# Altium PCB Copy of DAP-PCB.PcbDoc (part 5 of 5)
Units mm, origin at the board's own origin, x right, y up, seen from the top; angles counter-clockwise.
Board outline 63 x 53 mm, 6 copper layers (Top Layer (Sig), L2 (GND), L3 (Sig), L4 (Sig), L5 (GND), Bottom Layer (Sig)), stack 0.87 mm thick; 262 components, 167 nets, 874 pads, 298 vias.
Unrouted connection lines stored in the file: 134.
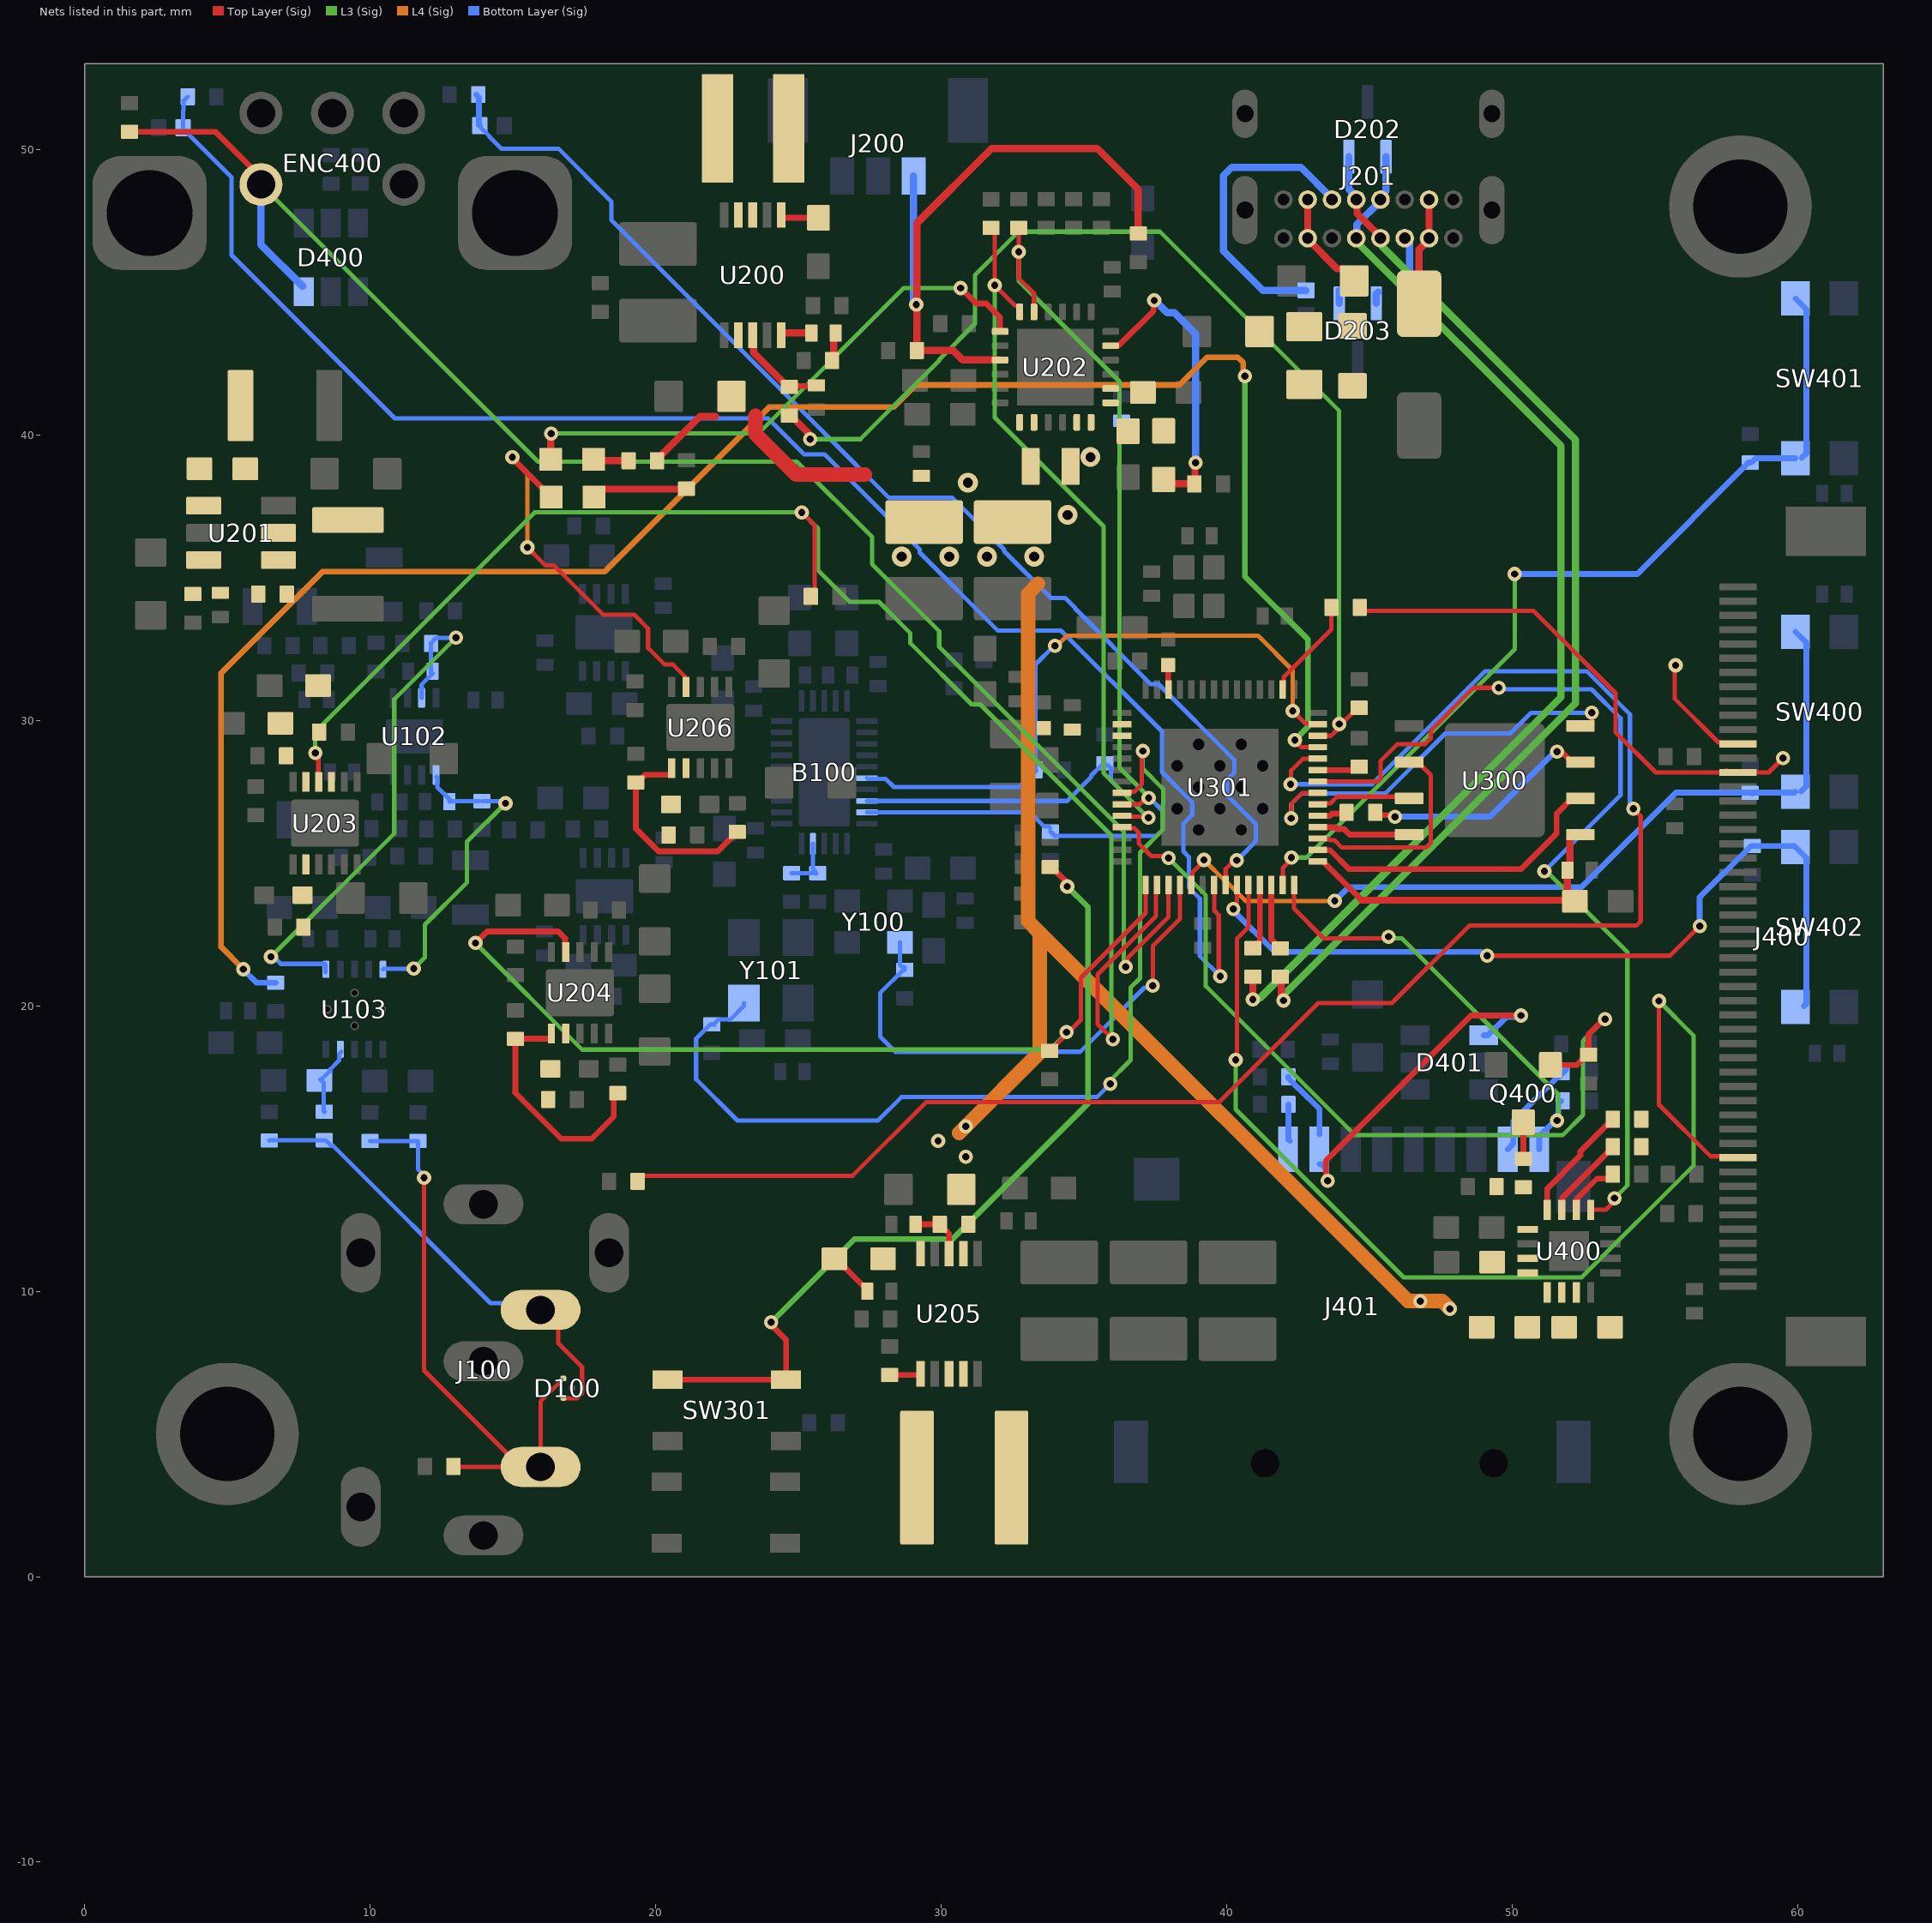
[diagram p7: the nets of this part, all layers, seen from the top]

## Via types
v1: diameter 0.5, hole 0.25, Top Layer (Sig) to Bottom Layer (Sig), tented both sides, 270 vias
v2: diameter 0.7, hole 0.35, Top Layer (Sig) to Bottom Layer (Sig), tented both sides, 17 vias
v3: diameter 1.25, hole 0.75, Top Layer (Sig) to Bottom Layer (Sig), 6 vias
v4: diameter 0.4/0.4/0.4/0.4/0.4/0.4 (per signal layer), hole 0.2, Top Layer (Sig) to Bottom Layer (Sig), tented both sides, 5 vias

## Nets (pads, with @x,y where several pads share a name; then routed paths per layer and width w, separated by ;. In a path a pad name is that pad's centre, name@x,y a point inside that pad or via, vN(x,y) a via of type N, cw(c..) or ccw(c..) an arc to the next point about the centre after c; other vN are vias at no path point) (continued)
NetC201_1: C201.1 L202.1 U201.5 | length 0.2
  Top Layer (Sig) w0.254: U201.5@6.403,36.751 U201.5@6.553,36.601
NetC201_2: C201.2 L201.2 U201.1
NetC205_1: C205.1 R201.1 R204.2 U201.3 | length 0.5
  Top Layer (Sig) w0.254: U201.3@3.789,35.435 3.972,35.618 U201.3@4.17,35.618 ; C205.1@4.724,34.425 C205.1@4.724,34.468 ; C205.1@4.801,34.425 C205.1@4.801,34.442
NetC212_1: C212.1 R213.1 | length 0.9
  Top Layer (Sig) w0.203: R213.1@26.213,42.697 R213.1@26.245,42.73 ; C212.1@26.245,43.506 C212.1@26.308,43.569
  Top Layer (Sig) w0.254: R213.1@26.245,42.73 C212.1@26.245,43.506
NetC219_2: C219.2 D201.A FB200.1 J201.A4 J201.A9 J201.B4 J201.B9 | length 7.4
  Top Layer (Sig) w0.254: J201.B4@42.842,48.242 42.842,46.852 43.872,45.821 44.098,45.821 44.471,45.448 C219.2@44.471,45.398 ; D201.A@46.745,44.597 46.745,46.505 47.092,46.852 J201.A4@47.092,46.892 J201.B9@47.092,48.242
NetC221_2: C221.2 R227.1
NetC223_1: C223.1 R233.2 U204.7
NetC226_2: C226.2 R238.1 | length 1.7
  Top Layer (Sig) w0.203: R238.1@26.265,11.14 26.315,11.14 27.26,10.196 27.302,10.196 27.432,10.066 C226.2@27.432,9.957
NetC233_1: C233.1 R248.2 U206.7
NetC302_2: C302.2 L300.1 U301.2 U301.3
NetC404_2: C404.2 R400.2 U301.22 | length 42.5
  Top Layer (Sig) w0.152: U301.22@39.964,24.234 39.964,24.788 40.272,25.095 v1(40.361,25.095)
  Bottom Layer (Sig) w0.152: C404.2@13.843,50.833 13.843,50.803 14.179,50.467 14.179,50.447 14.595,50.031 16.596,50.031 18.453,48.174 18.453,47.525 25.917,40.06 25.917,40.053 28.174,37.797 30.397,37.797 32.211,35.983 32.211,35.926 33.845,34.291 34.341,34.291 34.684,33.948 34.684,33.925 37.337,31.271 37.615,31.271 40.268,28.618 40.268,28.163 40.01,27.905 40.01,27.38 40.919,26.471 40.919,26.467 41.018,26.368 41.018,25.753 v1@40.437,25.171
  Bottom Layer (Sig) w0.203: R400.2@13.716,51.918 13.814,51.82 13.814,50.862 C404.2@13.843,50.833
NetC405_2: C405.2 R408.1 U301.21 | length 58.8
  Top Layer (Sig) w0.152: U301.21@39.564,24.234 39.564,23.338 39.726,23.177 39.726,21.082 v1(39.776,21.031)
  Bottom Layer (Sig) w0.152: C405.2@3.451,50.757 3.451,50.727 5.147,49.03 5.147,46.3 10.869,40.579 23.937,40.579 25.194,39.322 25.919,39.322 29.247,35.994 29.247,35.882 31.987,33.142 34.029,33.142 34.03,33.14 34.209,33.14 37.735,29.614 37.735,28.19 38.794,27.131 38.794,26.687 38.485,26.378 38.485,25.409 38.675,25.218 38.675,24.143 39.065,23.753 39.065,21.742 v1(39.776,21.031) ; C405.2@3.454,50.775 3.454,51.361 3.466,51.373 3.466,51.701 R408.1@3.615,51.849
NetC410_1: C410.1 U400.8
NetC410_2: C410.2 U400.9
NetC411_1: C411.1 U400.11
NetC411_2: C411.2 U400.10
NetD200_A: D200.A R206.1 | length 1.1
  Top Layer (Sig) w0.254: D200.A@17.983,39.141 18.026,39.098 R206.1@19.055,39.098
NetD203_1: D203.1 J201.B5 R234.2 | length 11
  Bottom Layer (Sig) w0.254: R234.2@42.778,45.067 41.267,45.067 39.887,46.448 39.887,49.079 40.184,49.377 40.954,49.377 42.597,49.377 43.692,48.283 J201.B5@43.692,48.242 ; D203.1@43.942,44.61 D203.1@43.942,45.067
NetD203_2: D203.2 J201.A5 R235.2 | length 2.4
  Bottom Layer (Sig) w0.254: D203.2@45.242,44.61 45.242,44.935 D203.2@45.315,45.008 ; J201.A5@46.242,46.892 46.41,46.892 R235.2@46.41,45.048
NetD204_A: D204.A R242.1 | length 3.2
  Top Layer (Sig) w0.254: D204.A@17.983,37.922 17.983,37.971 18.114,38.101 21.068,38.101 R242.1@21.082,38.116
NetD204_C: D204.C U206.4 | length 13.6
  Top Layer (Sig) w0.152: v1@15.405,36.163 16.135,35.433 16.434,35.433 18.161,33.706 19.246,33.706 19.736,33.215 19.736,32.537 20.32,31.953 20.609,31.953 21.016,31.546 21.016,31.221 U206.4@21.065,31.172
  Top Layer (Sig) w0.203: v1(14.981,39.218) 14.981,39.188 16.205,37.964 D204.C@16.205,37.846
  L4 (Sig) w0.152: v1(14.981,39.218) 15.507,38.692 v1(15.507,36.061)
NetD401_1: D401.1 J401.2 R416.1 | length 14.5
  Top Layer (Sig) w0.203: v1(43.535,13.868) 43.478,13.925 43.478,14.573 48.565,19.66 v1@50.368,19.66
  Bottom Layer (Sig) w0.203: R416.1@42.164,17.508 42.164,17.458 42.5,17.122 42.512,17.122 43.256,16.378 J401.2@43.256,15.494 ; J401.2@43.256,14.453 43.318,14.453 43.498,14.273 43.498,13.905 v1(43.535,13.868) ; D401.1@49.003,18.966 49.153,18.966 49.789,19.603 50.261,19.603 v1(50.317,19.66)
NetJ401_1: J401.1 R417.1 | length 1.3
  Bottom Layer (Sig) w0.203: R417.1@42.164,16.543 42.164,15.316 J401.1@42.215,15.265
NetJ401_8: J401.8 R418.1 | length 3.7
  Bottom Layer (Sig) w0.203: J401.8@49.849,14.971 50.041,15.163 50.041,15.954 51.574,17.488 51.617,17.488 51.881,17.752 R418.1@51.881,17.794
NetJ401_CD: J401.CD R419.2 U301.28 | length 15.8
  Top Layer (Sig) w0.152: U301.28@42.364,24.234 42.364,23.396 43.396,22.365 45.614,22.365 v1(45.669,22.42)
  L3 (Sig) w0.152: v1(45.669,22.42) 45.733,22.356 46.148,22.356 51.625,16.879 51.625,16.03 v1(51.574,15.979)
  Bottom Layer (Sig) w0.203: J401.CD@50.949,14.971 50.949,15.421 51.507,15.979 v1(51.574,15.979) ; v1@51.54,16.012 51.617,16.089 51.617,16.565 R419.2@51.714,16.662
NetQ400_1: Q400.1 R425.2 U301.11 | length 29.7
  Top Layer (Sig) w0.152: U301.11@36.339,26.259 36.373,26.225 36.767,26.225 36.918,26.074 36.918,25.693 37.363,25.248 37.897,25.248 v1(37.964,25.181)
  Top Layer (Sig) w0.203: Q400.1@51.344,17.926 52.275,17.926 R425.2@52.638,18.288 ; R425.2@52.68,18.28 52.68,18.999 v1@53.238,19.558
  L3 (Sig) w0.152: v1(37.964,25.181) 39.272,23.873 39.272,20.686 44.483,15.475 51.783,15.475 52.486,16.178 52.486,18.763 v1@53.315,19.592
  other v1: 53.256,19.533
NetQ400_3: Q400.3 R423.1 | length 1.3
  Top Layer (Sig) w0.203: R423.1@50.394,14.64 50.394,15.875 Q400.3@50.419,15.9
NetR119_1: R119.1 U301.38 | length 62.1
  Top Layer (Sig) w0.152: R119.1@19.37,13.854 19.37,13.874 19.544,14.048 26.902,14.048 29.482,16.627 39.741,16.627 43.208,20.094 45.788,20.094 48.504,22.809 54.356,22.809 54.503,22.956 54.503,26.64 54.249,26.894 v1(54.249,26.903) ; v1(42.242,27.762) 42.262,27.782 42.262,28.241 42.68,28.659 U301.38@43.189,28.659
  Bottom Layer (Sig) w0.152: v1(42.242,27.762) 45.095,27.762 49.057,31.725 52.613,31.725 54.127,30.21 54.127,27 v1@54.282,26.846
NetR128_1: R128.1 U301.39 | length 67.5
  Top Layer (Sig) w0.152: 42.57,29.108 42.62,29.059 U301.39@43.189,29.059
  L3 (Sig) w0.203: v1(40.64,42.062) 40.64,35.045 42.846,32.84 42.846,29.765 42.469,29.388 v1@42.469,29.337
  L4 (Sig) w0.203: v1(5.559,21.281) 4.779,22.061 4.779,31.664 8.323,35.208 18.216,35.208 23.981,40.974 28.331,40.974 29.112,41.754 38.35,41.754 39.319,42.723 40.386,42.723 40.583,42.526 40.583,42.119 v1(40.64,42.062) ; v1@42.418,29.362 v1@42.443,29.362
  Bottom Layer (Sig) w0.203: v1(5.559,21.281) 5.559,21.266 6.015,20.809 R128.1@6.695,20.809
  other v1: 42.393,29.312
NetR203_1: R203.1 R308.2 U301.40 | length 39.2
  Top Layer (Sig) w0.152: U301.40@43.189,29.459 43.658,29.459 43.876,29.677 43.876,29.804 v1(43.942,29.87) ; v1@43.891,29.921 44.073,29.921 44.53,30.378 R308.2@44.577,30.378
  Top Layer (Sig) w0.254: R203.1@24.684,40.681 24.734,40.681 25.425,39.99 v1@25.425,39.853
  L3 (Sig) w0.152: v1(25.413,39.851) 27.173,39.851 29.945,42.624 29.945,42.654 31.187,43.896 31.187,45.599 32.709,47.121 37.666,47.121 43.942,40.845 v1(43.942,29.87)
NetR204_1: R204.1 U201.4 | length 0.3
  Top Layer (Sig) w0.254: U201.4@6.79,35.618 U201.4@7.061,35.618
NetR207_2: R207.2 U200.1 | length 1.4
  Top Layer (Sig) w0.203: U200.1@24.398,47.706 24.398,47.658 24.449,47.607 25.611,47.607 R207.2@25.705,47.701
NetR219_1: R219.1 R226.2 U203.3
NetR220_1: R220.1 R224.2 U203.5
NetR222_1: R222.1 R228.2 U204.6 | length 8.6
  Top Layer (Sig) w0.203: R228.2@15.088,18.821 15.088,16.948 16.694,15.342 17.755,15.342 18.534,16.121 18.534,16.803 R222.1@18.671,16.941 ; R228.2@15.088,18.847 16.351,18.847 U204.6@16.351,19.03
NetR223_1: R223.1 U204.4 U301.15 | length 34
  Top Layer (Sig) w0.152: R223.1@33.788,18.396 33.829,18.396 34.031,18.598 34.031,18.639 34.43,19.037 34.9,19.507 34.9,20.98 37.164,23.245 37.164,24.019 U301.15@37.164,24.234
  Top Layer (Sig) w0.203: v1(13.691,22.2) 14.093,22.602 16.59,22.602 16.827,22.365 16.827,21.904 U204.4@16.851,21.88 ; U301.15@37.164,24.019 U301.15@37.164,24.234
  L3 (Sig) w0.152: v1(13.691,22.2) 17.424,18.466 33.807,18.466 v1@34.467,19.126
  other v1: 34.392,19.075
NetR238_2: R238.2 U205.10
NetR239_2: R239.2 U205.1 | length 1.1
  Top Layer (Sig) w0.203: R239.2@28.194,7.067 29.241,7.067 U205.1@29.277,7.103
NetR243_1: R243.1 R245.2 U206.6 | length 7.3
  Top Layer (Sig) w0.203: R245.2@19.355,27.864 19.304,27.813 19.304,26.211 20.107,25.408 22.174,25.408 22.662,25.895 22.662,25.945 22.81,26.094 R243.1@22.86,26.094 ; R245.2@19.456,27.889 19.456,27.927 19.618,28.088 20.541,28.088 20.565,28.112 U206.6@20.565,28.322
NetR302_2: R302.2 SW301.1 SW301.2 | length 29.5
  Top Layer (Sig) w0.203: SW301.1@20.419,6.904 SW301.2@24.569,6.904 24.569,8.299 v1@24.003,8.865 ; R302.2@33.822,24.861 33.872,24.861 34.36,24.373 34.36,24.238 v1(34.417,24.181)
  L3 (Sig) w0.203: v1(24.046,8.911) 26.959,11.824 30.389,11.824 35.147,16.583 35.147,23.451 v1(34.417,24.181)
NetR303_2: R303.2 U301.44 | length 3.6
  Top Layer (Sig) w0.152: U301.44@41.964,31.084 41.998,31.118 41.998,31.42 42,31.422 42,31.514 43.671,33.185 R303.2@43.671,33.96
NetR304_1: R304.1 U301.25 | length 2.3
  Top Layer (Sig) w0.203: R304.1@40.919,22.015 41.165,22.261 U301.25@41.165,24.233
NetR305_2: R305.2 U301.37 | length 1.5
  Top Layer (Sig) w0.203: U301.37@43.189,28.259 44.444,28.259 44.602,28.417 R305.2@44.602,28.448
NetR306_1: R306.1 U301.26 | length 2.4
  Top Layer (Sig) w0.203: U301.26@41.564,24.234 41.564,22.335 41.686,22.213 41.686,22.162 41.835,22.014 R306.1@41.885,22.014
NetR420_2: R420.2 U400.3 | length 2.9
  Top Layer (Sig) w0.203: U400.3@51.74,12.852 51.763,12.876 51.763,13.274 53.353,14.864 53.377,14.864 53.492,14.979 R420.2@53.492,15.037
NetR421_2: R421.2 U400.4 | length 4.2
  Top Layer (Sig) w0.203: U400.4@51.232,12.852 51.232,13.594 52.396,14.759 52.396,14.898 53.327,15.829 53.377,15.829 53.526,15.977 R421.2@53.526,16.027
NetR422_2: R422.2 U400.2 | length 2.1
  Top Layer (Sig) w0.203: U400.2@52.248,12.852 52.271,12.876 52.271,13.243 52.971,13.943 53.44,13.943 R422.2@53.594,14.097
NetR423_2: R423.2 R424.2 U400.5
NetU301_36: U301.36 U400.1 | length 33.5
  Top Layer (Sig) w0.152: U301.36@43.189,27.859 45.301,27.859 45.39,27.948 45.39,28.576 45.985,29.171 46.951,29.171 47.149,29.369 47.149,29.641 48.648,31.14 v1(49.53,31.14) ; U400.1@52.756,12.852 53.289,12.852 v1@53.746,13.31
  L3 (Sig) w0.152: v1(51.13,24.714) 51.206,24.714 54.038,21.883 54.038,13.708 v1(53.588,13.259)
  Bottom Layer (Sig) w0.152: v1(49.53,31.14) 49.581,31.09 52.781,31.09 53.797,30.074 53.797,27.381 v1(51.13,24.714)
PG_LDO-: R241.1 U203.4 U301.16 | length 55.4
  Top Layer (Sig) w0.152: v1(8.077,28.854) 8.077,28.76 8.188,28.65 8.188,27.851 U203.4@8.197,27.841 ; v1@25.171,37.262 25.171,37.236 25.572,36.836 25.572,34.48 R241.1@25.433,34.341 ; v1(36.017,18.821) 35.484,19.355 35.484,21.098 37.531,23.144 37.531,24.2 U301.16@37.564,24.234
  L3 (Sig) w0.152: v1(8.077,28.854) 8.077,29.593 15.772,37.287 25.044,37.287 v1@25.095,37.236 ; v1@25.171,37.287 25.171,37.236 25.689,36.718 25.689,35.252 26.792,34.149 27.823,34.149 28.925,33.047 28.925,32.701 31.064,30.562 31.369,30.562 35.961,25.97 35.961,18.878 v1(36.017,18.821)
  other v1: 25.121,37.287
PMID_BQ: C200.2 U202.20
POWER: R401.2 SW401.1 SW401.3 U301.27 | length 31.8
  Top Layer (Sig) w0.152: U301.27@41.964,24.234 41.964,24.824 42.272,25.132 v1(42.272,25.193)
  L3 (Sig) w0.152: v1(42.272,25.193) 42.795,25.193 50.089,32.487 v1(50.089,35.128)
  Bottom Layer (Sig) w0.203: v1(50.089,35.128) 54.384,35.128 58.286,39.03 R401.2@58.336,39.03 ; R401.2@58.395,39.039 58.536,39.18 SW401.1@59.925,39.18 ; SW401.3@59.925,44.78 60.304,44.401 60.304,39.349 SW401.1@60.147,39.192
RESET: J400.10 U301.24 | length 41.4
  Top Layer (Sig) w0.152: v1@40.335,18.136 40.365,18.166 40.365,22.352 40.764,22.751 U301.24@40.764,24.234 ; v1(55.143,20.168) 55.143,16.537 56.955,14.725 57.741,14.725 J400.10@57.76,14.707
  L3 (Sig) w0.152: v1(40.318,18.103) 40.318,16.372 46.207,10.483 52.434,10.483 56.363,14.412 56.363,18.948 v1(55.143,20.168)
RESETB_DAC: B100.21 R111.2 U301.41 | length 22.4
  Top Layer (Sig) w0.152: v1(42.316,30.328) 42.751,29.893 43.156,29.893 U301.41@43.189,29.859
  L4 (Sig) w0.152: v1(33.988,32.612) 34.058,32.612 34.415,32.969 41.097,32.969 42.316,31.75 v1(42.316,30.328)
  Bottom Layer (Sig) w0.152: B100.21@27.408,27.976 27.432,27.952 28.055,27.952 28.346,27.661 32.748,27.661 R111.2@33.332,28.245 ; R111.2@33.307,28.27 33.307,31.961 33.958,32.612 v1(33.988,32.612)
RIGHT_EAR: C124.1 R125.1 U103.9 | length 2.5
  Bottom Layer (Sig) w0.152: C124.1@8.255,17.424 8.373,17.306 8.373,16.311 R125.1@8.396,16.288 ; C124.1@8.28,17.4 8.592,17.712 8.592,17.762 8.91,18.08 8.91,18.308 U103.9@8.992,18.39
RING: D100.3 J100.3 R117.2 R125.2 | length 16.2
  Top Layer (Sig) w0.152: J100.3@15.97,9.344 16.017,9.344 16.594,8.767 16.594,8.17 17.423,7.341 17.423,6.428 17.245,6.25 16.793,6.25 16.789,6.253 D100.3@16.789,6.274
  Bottom Layer (Sig) w0.152: R117.2@6.466,15.28 6.47,15.284 8.439,15.284 R125.2@8.484,15.24 ; R125.2@8.499,15.235 8.62,15.114 8.686,15.114 14.217,9.583 15.97,9.583 J100.3@16.053,9.5
SCL_BQ: B100.23 R110.1 R208.1 U202.6 U301.10 | length 36.8
  Top Layer (Sig) w0.152: R208.1@31.775,47.226 31.877,47.125 v1(31.877,45.245) 32.598,44.524 32.709,44.524 32.753,44.48 U202.6@32.753,44.31 ; U301.10@36.339,26.659 36.372,26.626 37.233,26.626 v1(37.266,26.593)
  L3 (Sig) w0.152: v1(31.877,45.245) 31.877,40.607 35.692,36.792 35.692,28.151 37.25,26.593 v1(37.266,26.593)
  Bottom Layer (Sig) w0.152: B100.23@27.408,27.176 34.415,27.176 35.257,28.018 35.257,28.068 35.598,28.409 R110.1@35.648,28.409 ; R110.1@35.738,28.499 R110.1@35.648,28.409 ; v1(37.266,26.593) 37.25,26.593 35.952,27.891 35.952,28.325 35.868,28.409 R110.1@35.648,28.409
SCL_LCD: J400.37 R303.1 | length 17.7
  Top Layer (Sig) w0.152: R303.1@44.671,33.833 50.749,33.833 53.627,30.955 53.627,29.581 55.034,28.173 55.449,28.173 57.434,28.173 J400.37@57.506,28.245 ; J400.37@57.912,28.177 58.985,28.177 v1@59.436,28.627
  Top Layer (Sig) w0.254: v1@59.436,28.627 v1@59.436,28.651
  other v1: 59.485,28.676
SDA_BQ: B100.24 R109.1 R211.1 U202.5 U301.9 | length 37.3
  Top Layer (Sig) w0.152: R211.1@32.741,47.252 32.715,47.226 32.715,45.499 33.253,44.961 U202.5@33.253,44.31 ; U301.9@36.339,27.059 36.952,27.059 37.177,27.284 v1(37.272,27.284)
  L3 (Sig) w0.152: v1@32.715,46.406 32.717,46.404 32.717,45.402 36.246,41.874 36.246,28.341 37.272,27.315 v1(37.272,27.284)
  Bottom Layer (Sig) w0.152: B100.24@27.408,26.776 33.11,26.776 33.609,26.277 33.768,26.277 R109.1@33.807,26.238 ; R109.1@33.833,26.103 33.981,25.955 37.537,25.955 37.77,26.188 37.77,26.802 37.767,26.805 37.767,26.824 37.307,27.284 v1(37.272,27.284)
  other v1: 32.717,46.417
SELECT: D400.3 ENC400.5 R412.2 U301.17 | length 58.4
  Top Layer (Sig) w0.152: v1(36.465,21.366) 36.528,21.429 36.528,21.675 37.964,23.111 U301.17@37.964,24.234
  Top Layer (Sig) w0.203: R412.2@1.575,50.622 4.572,50.622 6.176,49.018 ENC400.5@6.176,48.776
  L3 (Sig) w0.152: ENC400.5@6.172,48.768 6.184,48.768 15.886,39.065 24.943,39.065 27.584,36.424 27.584,35.467 29.933,33.119 29.933,32.577 36.398,26.111 36.398,21.432 v1(36.465,21.366)
  Bottom Layer (Sig) w0.254: ENC400.5@6.176,48.776 6.176,46.666 7.63,45.212 D400.3@7.645,45.212
SET_LDO-: C222.2 R232.2 U203.8
SHDN_BB_3.3: C230.2 R237.2 U205.8 | length 2
  Top Layer (Sig) w0.203: C230.2@29.108,12.344 R237.2@29.955,12.344 ; R237.2@29.955,12.294 30.103,12.146 30.153,12.146 30.277,12.022 U205.8@30.277,11.317
SHDN_BB_3.9: C213.2 R203.2 U200.8 | length 3.3
  Top Layer (Sig) w0.203: R203.2@24.714,41.656 24.768,41.71 25.605,41.71 C213.2@25.633,41.739
  Top Layer (Sig) w0.254: U200.8@23.398,43.492 23.424,43.467 23.424,42.891 24.583,41.732 R203.2@24.638,41.732
SPI_CS0: U300.1 U301.32 | length 3
  Top Layer (Sig) w0.203: U301.32@43.485,26.249 43.8,26.249 43.856,26.192 44.115,26.192 44.311,25.996 U300.1@46.395,25.996
SPI_D: U300.5 U301.35 | length 14.7
  Top Layer (Sig) w0.152: v1(42.266,26.568) 42.266,27.073 42.652,27.459 U301.35@43.189,27.459 ; U300.5@52.395,29.806 52.669,29.806 52.793,29.93 v1(52.793,30.265)
  Bottom Layer (Sig) w0.152: v1(42.266,26.568) 42.266,27.073 42.625,27.432 45.552,27.432 47.66,29.54 49.939,29.54 50.664,30.265 v1(52.793,30.265)
SPI_HD: U300.7 U301.30 | length 10.7
  Top Layer (Sig) w0.203: U301.30@43.189,25.459 43.198,25.451 43.489,25.451 43.492,25.449 43.63,25.449 44.292,24.786 50.302,24.786 51.562,26.046 51.562,26.733 52.109,27.28 U300.7@52.222,27.28
SPI_Q: U300.2 U301.34 | length 3.3
  Top Layer (Sig) w0.152: U301.34@43.189,27.059 43.223,27.093 43.634,27.093 43.866,27.326 46.334,27.326 U300.2@46.355,27.305
SPI_WP: U300.3 U301.31 | length 7.5
  Top Layer (Sig) w0.152: U301.31@43.189,25.859 43.219,25.83 43.613,25.83 43.639,25.804 43.777,25.804 44.039,25.542 46.986,25.542 47.149,25.705 47.149,28.086 46.822,28.412 46.519,28.412 U300.3@46.395,28.536
SPICLK: R307.2 U301.33 | length 0.7
  Top Layer (Sig) w0.203: 43.536,26.649 43.609,26.649 43.692,26.732 44.164,26.732 R307.2@44.204,26.772
SPICLK_FL: R307.1 U300.6 | length 8.3
  Top Layer (Sig) w0.203: R307.1@45.204,26.772 45.295,26.68 45.839,26.68 v1(45.896,26.623) ; v1(51.573,28.904) 51.63,28.847 51.784,28.847 52.095,28.536 U300.6@52.395,28.536
  Bottom Layer (Sig) w0.203: v1(45.896,26.623) 49.223,26.624 51.503,28.904 v1(51.573,28.904)
STAT_BQ: D200.C U202.7 | length 19.8
  Top Layer (Sig) w0.203: v1(30.683,45.143) 31.226,44.6 31.582,44.6 32.068,44.114 U202.7@32.068,43.625
  Top Layer (Sig) w0.254: D200.C@16.327,39.142 v1@16.327,40.035
  L3 (Sig) w0.152: v1(16.338,40.049) 23.592,40.049 28.686,45.143 30.767,45.143 v1@30.836,45.212
SUMM_L: C118.1 R114.2 U102.1 U103.5 | length 11.1
  L3 (Sig) w0.152: v1(11.527,21.302) 11.917,21.692 11.917,22.84 13.386,24.309 13.386,25.74 v1@14.757,27.111
  Bottom Layer (Sig) w0.152: U103.5@10.454,21.275 10.482,21.302 11.489,21.302 v1@11.506,21.285 ; U102.1@12.319,28.016 12.356,27.979 12.356,27.66 12.776,27.24 C118.1@12.776,27.152 12.794,27.17 R114.2@13.809,27.17 ; R114.2@13.919,27.17 14.613,27.17 v1@14.656,27.127
  other v1: 14.741,27.095
SUMM_R: C123.1 R115.2 U102.7 U103.1 | length 19.2
  L3 (Sig) w0.152: v1(6.528,21.717) 10.846,26.035 10.846,30.734 v1@12.979,32.868
  Bottom Layer (Sig) w0.152: v1(6.528,21.717) 6.622,21.717 6.87,21.469 8.41,21.469 8.433,21.446 U103.1@8.433,21.184 ; U102.7@11.807,30.786 11.807,31.259 12.167,31.618 C123.1@12.167,31.648 ; C123.1@12.192,31.648 12.133,31.648 12.133,32.714 12.307,32.888 13,32.888 v1(13.005,32.893)
SW1_BB_3.3: L204.1 U205.3
SW1_BB_3.9: L200.1 U200.3
SW2_BB_3.3: L204.2 U205.4
SW2_BB_3.9: L200.2 U200.4
SW_BQ: C207.1 L203.1 U202.17 U202.18
  other v2: 34.432,37.197 35.23,39.225
SYS: C203.2 C208.2 C209.2 C210.2 C224.2 C412.2 L203.2 R206.2 R237.1 R420.1 R421.1 U200.7 U202.13 U202.14 U205.7 U400.7 | length 48.3
  Top Layer (Sig) w0.254: R206.2@20.055,39.098 20.055,39.148 21.546,40.64 22.098,40.64
  Top Layer (Sig) w0.508: 23.495,40.677 23.495,40.03 24.917,38.608 27.323,38.608
  L4 (Sig) w0.508: 30.632,15.545 v1(30.861,15.773) 33.449,18.361 33.449,22.559 ; 33.397,34.789 33.049,34.441 33.049,22.959 33.449,22.559 ; v1(47.82,9.381) 47.549,9.652 46.356,9.652 33.449,22.559
  other v1: 46.787,9.652 30.861,14.707 29.896,15.265
  other v2: 28.618,35.733 30.286,35.733 31.607,35.733 33.258,35.733 30.937,38.325
TE: J400.39 | length 3.7
  Top Layer (Sig) w0.152: v1(55.728,31.928) 55.693,31.893 55.693,30.762 57.229,29.225 57.49,29.225 J400.39@57.539,29.177
TIP: D100.2 J100.2 R127.2 R129.2 R134.2 | length 21.2
  Top Layer (Sig) w0.152: v1(11.887,13.97) 11.887,7.227 15.075,4.039 J100.2@15.418,4.039 ; R129.2@12.852,3.912 12.92,3.844 J100.2@15.97,3.844 15.97,6.145 16.759,6.934 D100.2@16.764,6.934
  Bottom Layer (Sig) w0.152: R127.2@9.997,15.263 R134.2@11.661,15.263 ; R134.2@11.673,15.263 11.673,14.278 11.887,14.064 v1(11.887,13.97)
TRI_STATE_22: R106.2 U301.18 Y100.1 | length 18.4
  Top Layer (Sig) w0.152: v1(37.414,20.701) 37.414,22.094 38.364,23.044 U301.18@38.364,24.234
  Bottom Layer (Sig) w0.152: Y100.1@28.56,22.219 28.56,21.433 28.632,21.361 R106.2@28.727,21.361 ; R106.2@28.727,21.259 28.677,21.259 27.864,20.446 27.864,18.923 28.397,18.39 34.873,18.39 37.118,20.634 37.348,20.634 v1(37.414,20.701)
TRI_STATE_24: R107.2 U301.8 Y101.1 | length 34
  Top Layer (Sig) w0.152: U301.8@36.339,27.459 36.373,27.493 36.767,27.493 37.033,27.759 v1@37.033,28.854
  L3 (Sig) w0.152: v1@35.835,17.293 36.64,18.098 36.64,20.639 36.969,20.968 36.969,25.366 37.77,26.168 37.77,26.802 37.76,26.812 37.76,27.06 37.775,27.076 37.775,27.597 37.065,28.308 v1(37.065,28.923)
  Bottom Layer (Sig) w0.152: R107.2@21.971,19.354 21.921,19.354 21.417,18.85 21.417,17.427 22.868,15.977 27.788,15.977 28.612,16.801 35.461,16.801 35.88,17.221 v1@35.992,17.221 ; R107.2@22.047,19.329 22.047,19.371 22.195,19.519 22.62,19.519 23.094,19.993 Y101.1@23.094,20.093
  other v1: 35.926,17.267
TS: J200.3 R214.1 R215.2 U202.9 | length 23.1
  Top Layer (Sig) w0.254: U202.9@32.068,42.625 30.76,42.625 30.426,42.959 R215.2@29.151,42.959 29.151,44.566 29.151,47.421 31.768,50.038 35.466,50.038 36.906,48.598 R214.1@36.906,47.058
  Bottom Layer (Sig) w0.254: J200.3@29.038,49.071 29.038,44.725 29.185,44.577 v1@29.21,44.577
  other v1: 29.13,44.566
USB_D_N: D202.1 J201.A7 J201.B7 R304.2 | length 38.2
  Top Layer (Sig) w0.254: v1(40.919,20.218) R304.2@40.919,21.015
  L3 (Sig) w0.254: v1(40.919,20.218) 40.966,20.265 41.167,20.265 51.714,30.813 51.714,39.612 44.542,46.785 J201.A7@44.542,46.892
  Bottom Layer (Sig) w0.254: J201.A7@44.542,46.892 44.557,46.908 44.557,47.367 45.392,48.202 J201.B7@45.392,48.242 ; J201.B7@45.441,48.318 45.441,48.398 45.583,48.54 D202.1@45.583,49.746
USB_D_P: D202.2 J201.A6 J201.B6 R306.2 | length 37.9
  Top Layer (Sig) w0.254: R306.2@41.885,21.014 41.923,20.976 41.923,20.323 41.994,20.252 v1(41.994,20.185) ; J201.B6@44.542,48.242 44.568,48.216 44.568,47.757 45.392,46.933 J201.A6@45.392,46.892
  L3 (Sig) w0.254: v1(41.994,20.185) 42.041,20.232 42.041,20.421 52.222,30.603 52.222,39.823 45.467,46.578 45.467,46.816 J201.A6@45.392,46.892
  Bottom Layer (Sig) w0.254: D202.2@44.283,49.746 44.283,48.608 44.577,48.314 J201.B6@44.577,48.268
VC_BB_3.9: C212.2 U200.10 | length 1.2
  Top Layer (Sig) w0.203: U200.10@24.398,43.492 24.398,43.518 U200.10@24.449,43.569 ; C212.2@25.443,43.569 C212.2@25.502,43.51
  Top Layer (Sig) w0.254: U200.10@24.449,43.569 C212.2@25.443,43.569
VDD_SPI: C311.2 C312.2 U300.8 U301.29 | length 12.2
  Top Layer (Sig) w0.203: U301.29@43.409,25.044 43.409,25.021 44.731,23.698
  Top Layer (Sig) w0.254: 44.731,23.698 C312.2@52.172,23.698 ; C312.2@52.222,23.749 52.123,23.749 51.939,23.932 C311.2@51.939,24.745 52.022,24.828 52.022,25.923 52.134,26.035 U300.8@52.426,26.035
VDPM_BQ: R202.1 R205.2 U202.23 | length 10.8
  Top Layer (Sig) w0.203: U202.23@35.938,43.125 35.956,43.143 36.233,43.143 37.444,44.354 37.444,44.691 v1(37.465,44.712)
  Top Layer (Sig) w0.254: R202.1@37.795,38.44 37.949,38.285 R205.2@38.87,38.285 38.862,38.285 38.862,38.44 38.879,38.456 38.889,38.456 38.891,38.458 38.891,39.001 v1(38.913,39.022)
  Bottom Layer (Sig) w0.254: v1@37.44,44.737 37.46,44.737 37.922,44.276 38.177,44.276 38.913,43.54 v1(38.913,39.022)
VOLUME+: R404.2 SW400.1 SW400.3 U301.19 | length 29.7
  Top Layer (Sig) w0.152: U301.19@38.764,24.234 38.798,24.268 38.798,24.57 38.8,24.572 38.8,24.664 39.218,25.082 v1@39.218,25.115
  L4 (Sig) w0.152: v1(39.205,25.112) 39.981,24.336 40.004,24.336 40.667,23.673 43.713,23.673 v1@43.764,23.724
  Bottom Layer (Sig) w0.203: v1(43.79,23.673) 44.272,24.155 52.426,24.155 55.736,27.465 R404.2@58.336,27.465 ; R404.2@58.42,27.432 58.453,27.465 59.888,27.465 SW400.1@59.925,27.502 ; SW400.3@59.925,33.102 60.304,32.723 60.304,27.69 SW400.1@60.122,27.508
VOLUME-: R406.2 SW402.1 SW402.3 U301.23 | length 29.4
  Top Layer (Sig) w0.152: v1(40.234,23.393) 40.234,23.487 40.364,23.618 40.364,24.217 U301.23@40.356,24.226 ; v1(49.13,21.755) 55.531,21.755 56.611,22.835 v1@56.693,22.835
  Top Layer (Sig) w0.203: U301.23@40.356,24.226 U301.23@40.364,24.234
  Bottom Layer (Sig) w0.203: v1(40.234,23.393) 40.234,23.333 41.676,21.891 48.914,21.891 49.037,21.768 v1@49.149,21.768 ; v1@56.566,22.835 56.566,23.799 58.362,25.595 59.888,25.595 SW402.3@59.925,25.558 60.304,25.179 60.304,20.07 SW402.1@60.223,19.99
  other v1: 56.571,22.795
VUSB: C202.2 FB200.2 R202.2 R227.2 U202.19
XI: B100.29 R104.2 R105.1 | length 1.9
  Bottom Layer (Sig) w0.152: R105.1@24.765,24.646 25.621,24.646 R104.2@25.629,24.638 ; B100.29@25.508,25.676 25.508,24.784 R104.2@25.603,24.689
XTAL_P: L301.2 U301.54 | length 0.9
  Top Layer (Sig) w0.203: L301.2@37.948,31.935 37.954,31.929 37.954,31.386 37.956,31.384 37.956,31.093 U301.54@37.964,31.084
pads on no net: B100.4 B100.5 B100.6 B100.7 B100.26 B100.28 D400.6 ENC400.6 ENC400.7 J100.5 J201.A8 J201.B8 J400.44 J400.45 J400.46 J400.47 J400.S1 J400.S2 J401. U203.7 U301.1 U301.49 U301.50
copper on no net:
  other v3: 59.4,22.758 62.15,22.758 59.4,30.302 62.15,30.302 59.4,41.98 62.15,41.98

## Polygon pours and split planes (outlines as drawn)
EN_DAC_LDO+ on Top Layer (Sig) "EN_DAC_LDO+_L01_P043" (solid, pour order 43): 21.438,30.836 21.438,31.547 20.599,32.385 20.244,32.385 20.244,33.401 22.377,33.401 22.377,32.487 21.692,31.801 21.692,30.836
+3V3_DIG on Top Layer (Sig) "+3V3_DIG_L01_P032" (solid, pour order 32): 36.627,32.512 35.814,33.325 35.814,34.519 36.373,34.519 36.703,34.188 36.703,33.782 37.465,33.782 37.465,31.648 37.668,31.445 37.668,30.759 36.627,30.759
+3V3_DIG on Top Layer (Sig) "+3V3_DIG_L01_P099" (solid, pour order 99): 30.15,31.699 30.15,30.353 34.011,30.353 34.011,31.064 34.62,31.064 34.62,32.004 33.909,32.004 33.02,31.115 32.233,31.115 31.648,31.699
+3V3_DIG on Top Layer (Sig) "+3V3_DIG_L01_P097" (solid, pour order 97): 57.252,13.792 59.538,13.792 59.538,13.056 57.252,13.056
+3V3_DIG on Top Layer (Sig) "+3V3_DIG_L01_P096" (solid, pour order 96): 57.288,30.677 57.288,29.566 58.547,29.566 58.547,30.81 57.277,30.81
-3V3 on Top Layer (Sig) "-3V3_L01_P054" (solid, pour order 54): 8.509,25.298 8.509,24.587 8.814,24.282 8.814,22.123 8.077,22.123 8.077,18.898 10.744,18.898 10.744,25.298
+3V3_ANALOG on Top Layer (Sig) "+3V3_ANALOG_L01_P049" (solid, pour order 49): 19.406,17.501 19.406,16.408 21.463,16.408 21.463,19.38 17.729,19.38 17.729,18.618 18.263,18.618 18.263,17.501
+3V3_DAC on Top Layer (Sig) "+3V3_DAC_L01_P044" (solid, pour order 44): 24.943,28.677 23.673,28.677 21.946,28.677 21.946,27.965 22.454,27.457 22.454,26.594 23.571,26.594 23.571,25.324 24.943,25.324 24.943,26.924
+3V3_DIG on Top Layer (Sig) "+3V3_DIG_L01_P021" (solid, pour order 21): 31.166,11.75 32.385,11.75 32.817,12.182 32.817,12.715 33.655,13.553 33.655,14.732 40.056,14.732 43.307,11.481 43.307,9.769 32.385,9.769 31.166,10.988
NetC411_1 on Top Layer (Sig) "NETC411_1_L01_P065" (solid, pour order 65): 52.121,9.525 52.476,9.169 52.476,8.306 54.026,8.306 54.026,9.373 52.502,9.373 52.375,9.5 52.375,10.312 52.121,10.312
NetC411_2 on Top Layer (Sig) "NETC411_2_L01_P064" (solid, pour order 64): 51.613,9.169 51.46,9.169 51.181,8.89 51.181,8.28 52.299,8.28 52.299,9.068 51.867,9.5 51.867,10.312 51.613,10.312
NetR423_2 on Top Layer (Sig) "NETR423_2_L01_P063" (solid, pour order 63): 50.902,12.04 50.902,13.97 49.149,13.97 49.149,13.284 49.505,13.284 50.19,12.598 50.19,12.04
+LED on Top Layer (Sig) "+LED_L01_P061" (solid, pour order 61): 49.936,11.938 50.089,11.786 50.902,11.786 50.902,11.532 49.911,11.532 49.682,11.76 48.438,11.76 48.438,12.852 49.581,12.852 49.936,12.497
SYS on Top Layer (Sig) "SYS_L01_P059" (solid, pour order 59): 48.438,10.16 46.38,10.16 46.38,8.814 47.879,8.814 50.089,11.024 50.902,11.024 50.902,11.278 49.886,11.278 49.682,11.481 48.438,11.481
NetC410_2 on Top Layer (Sig) "NETC410_2_L01_P057" (solid, pour order 57): 51.003,8.992 51.003,8.255 49.886,8.255 49.886,9.093 51.105,10.312 51.359,10.312 51.359,9.347
NetC410_1 on Top Layer (Sig) "NETC410_1_L01_P058" (solid, pour order 58): 50.902,10.77 50.902,10.363 49.682,9.144 49.682,8.28 48.387,8.28 48.387,8.966 50.19,10.77
+LED on Top Layer (Sig) "+LED_L01_P056" (solid, pour order 56): 56.083,10.312 56.083,9.627 58.598,9.627 58.598,10.312
SET_LDO- on Top Layer (Sig) "SET_LDO-_L01_P055" (solid, pour order 55): 7.62,25.298 7.62,24.562 7.163,24.105 7.163,22.327 8.128,22.327 8.128,24.282 7.874,24.536 7.874,25.298
NetR220_1 on Top Layer (Sig) "NETR220_1_L01_P053" (solid, pour order 53): 7.874,27.534 7.874,28.27 7.391,28.753 7.391,30.328 6.248,30.328 6.248,29.235 6.756,29.235 6.756,28.397 7.468,28.397 7.62,28.245 7.62,27.534
NetR219_1 on Top Layer (Sig) "NETR219_1_L01_P052" (solid, pour order 52): 8.509,27.508 8.509,29.286 7.595,29.286 7.595,31.648 8.763,31.648 8.763,27.508
-3V9 on Top Layer (Sig) "-3V9_L01_P050" (solid, pour order 50): 8.941,27.483 8.941,29.896 11.252,29.896 11.252,27.483
NetC223_1 on Top Layer (Sig) "NETC223_1_L01_P048" (solid, pour order 48): 15.951,16.434 15.951,17.907 16.713,18.669 16.713,19.38 16.967,19.38 16.967,17.45 16.662,17.145 16.662,16.434
EN_LDO+ on Top Layer (Sig) "EN_LDO+_L01_P047" (solid, pour order 47): 17.223,21.522 17.223,22.401 16.586,23.038 16.03,23.038 16.03,24.087 18.034,24.087 18.034,23.089 17.477,22.532 17.477,21.522
+3V9 on Top Layer (Sig) "+3V9_L01_P046" (solid, pour order 46): 18.923,22.962 18.923,21.539 17.729,21.539 17.729,22.504 18.212,22.987 18.212,24.943 20.523,24.943 20.523,23.292 20.193,22.962
NetC233_1 on Top Layer (Sig) "NETC233_1_L01_P045" (solid, pour order 45): 20.091,25.603 20.091,27.635 20.65,27.635 20.93,27.915 20.93,28.677 21.184,28.677 21.184,26.518 20.777,26.111 20.777,25.603
NetR204_1 on Top Layer (Sig) "NETR204_1_L01_P042" (solid, pour order 42): 6.147,36.043 7.976,36.043 7.976,34.773 7.315,34.112 6.833,34.112 6.833,35.001 6.147,35.001
NetC201_1 on Top Layer (Sig) "NETC201_1_L01_P039" (solid, pour order 39): 5.08,37.516 5.08,39.091 5.436,39.446 6.883,39.446 6.883,38.938 5.994,38.049 5.994,36.881 7.366,36.881 8.128,37.643 10.668,37.643 10.668,36.246 5.08,36.246
NetC205_1 on Top Layer (Sig) "NETC205_1_L01_P041" (solid, pour order 41): 3.124,36.043 3.124,34.239 3.251,34.112 6.629,34.112 6.629,34.823 5.969,34.823 5.969,36.043
+3V9 on Top Layer (Sig) "+3V9_L01_P040" (solid, pour order 40): 21.946,30.836 21.946,31.75 22.555,32.36 22.555,34.341 24.714,34.341 24.714,33.071 24.079,33.071 23.139,32.131 23.139,30.836 21.996,30.836
-3V9 on Top Layer (Sig) "-3V9_L01_P038" (solid, pour order 38): 1.702,34.188 1.702,32.766 10.668,32.766 10.668,34.976 8.458,34.976 7.417,33.934 3.15,33.934 2.896,34.188
NetC201_2 on Top Layer (Sig) "NETC201_2_L01_P037" (solid, pour order 37): 3.505,37.211 3.505,40.818 5.004,42.316 6.655,42.316 6.655,39.624 5.334,39.624 4.877,39.167 4.877,37.211 4.216,37.211
+3V9 on Top Layer (Sig) "+3V9_L01_P035" (solid, pour order 35): 6.172,37.211 6.172,37.922 7.337,39.087 7.337,42.291 9.042,42.291 9.042,38.049 8.23,38.049 7.337,37.211
+3V9 on Top Layer (Sig) "+3V9_L01_P029" (solid, pour order 29): 22.555,43.053 22.555,44.831 17.399,44.831 17.399,43.053
NetC302_2 on Top Layer (Sig) "NETC302_2_L01_P034" (solid, pour order 34): 36.678,29.997 33.249,29.997 33.249,29.362 36.678,29.362
GND on Top Layer (Sig) "GND_L01_P031" (solid, pour order 31): 33.63,40.157 33.63,41.097 34.392,41.097 34.392,40.157 34.341,40.157
SYS on Top Layer (Sig) "SYS_L01_P017" (solid, pour order 17): 32.643,40.724 32.643,38.87 31.594,38.87 27.051,38.87 27.051,35.23 33.887,35.23 33.887,39.682 33.379,40.19 33.379,40.724
SYS on Top Layer (Sig) "SYS_L01_P030" (solid, pour order 30): 21.946,42.85 22.733,42.85 22.733,43.942 23.063,43.942 23.063,42.52 23.724,41.859 23.724,40.513 21.946,40.513
SW1_BB_3.9 on Top Layer (Sig) "SW1_BB_3.9_L01_P027" (solid, pour order 27): 23.241,47.269 23.241,48.539 23.851,49.149 23.851,52.832 25.654,52.832 25.654,48.692 23.927,48.692 23.546,48.311 23.546,47.269
SW2_BB_3.9 on Top Layer (Sig) "SW2_BB_3.9_L01_P026" (solid, pour order 26): 23.063,47.269 23.063,48.692 22.911,48.844 22.911,52.832 21.107,52.832 21.107,48.489 22.581,48.489 22.733,48.336 22.733,47.269
NetR238_2 on Top Layer (Sig) "NETR238_2_L01_P023" (solid, pour order 23): 27.432,10.744 27.432,11.532 29.439,11.532 29.439,10.744
SYS on Top Layer (Sig) "SYS_L01_P022" (solid, pour order 22): 30.632,10.897 30.937,10.897 30.937,11.938 30.988,11.989 31.42,11.989 31.42,16.256 29.515,16.256 29.515,13.589 30.632,12.471
SW1_BB_3.3 on Top Layer (Sig) "SW1_BB_3.3_L01_P020" (solid, pour order 20): 30.429,7.533 30.124,7.533 30.124,6.502 29.53,5.908 27.229,5.908 27.229,0.98 30.124,0.98 30.124,5.73 30.429,6.035
SW2_BB_3.3 on Top Layer (Sig) "SW2_BB_3.3_L01_P018" (solid, pour order 18): 30.937,7.559 30.937,6.477 31.532,5.882 34.138,5.882 34.138,0.955 30.963,0.955 30.963,5.755 30.632,6.086 30.632,7.559
BAT+ on Top Layer (Sig) "BAT+_L01_P016" (solid, pour order 16): 29.896,41.257 29.896,39.047 32.385,39.047 32.385,41.74 31.75,41.74 31.267,41.257
VUSB on Top Layer (Sig) "VUSB_L01_P014" (solid, pour order 14): 35.916,41.257 35.916,39.657 36.093,39.479 43.485,39.479 45.11,41.105 45.11,42.654 42.062,42.654 40.132,40.724 36.5,40.724 36.5,40.952 36.195,41.257
PMID_BQ on Top Layer (Sig) "PMID_BQ_L01_P015" (solid, pour order 15): 35.839,41.74 36.449,41.74 36.627,41.918 37.998,41.918 37.998,40.902 36.83,40.902 36.246,41.486 35.839,41.486
SW_BQ on Top Layer (Sig) "SW_BQ_L01_P010" (solid, pour order 10): 34.62,40.724 34.62,40.165 34.061,39.606 34.061,36.203 35.662,36.203 35.662,40.724
NetC221_2 on Top Layer (Sig) "NETC221_2_L01_P007" (solid, pour order 7): 43.536,44.407 43.536,42.832 40.64,42.832 40.64,44.407
LDO_BQ on Top Layer (Sig) "LDO_BQ_L01_P005" (solid, pour order 5): 36.347,45.474 36.474,45.601 36.474,46.261 36.703,46.49 37.313,46.49 37.313,45.753 36.22,44.661 36.22,43.518 35.636,43.518 35.636,45.321 35.789,45.474
NetC219_2 on Top Layer (Sig) "NETC219_2_L01_P000" (solid, pour order 0): 43.739,45.931 43.739,42.832 47.549,42.832 47.549,45.931
GND on Bottom Layer (Sig) "GND_L06_P112" (solid, pour order 112): 4.115,39.167 4.115,14.681 -0.076,14.681 -0.076,53 63,53 63,0 -0.127,0 -0.127,14.681 25.908,14.681 25.908,39.167
-3V3 on Bottom Layer (Sig) "-3V3_L06_P107" (solid, pour order 107): 20.574,33.731 18.821,33.731 18.821,34.392 20.574,34.392
+3V3_ANALOG on Bottom Layer (Sig) "+3V3_ANALOG_L06_P105" (solid, pour order 105): 12.192,30.378 13.843,30.378 13.843,31.953 13.487,32.309 13.132,32.309 12.776,31.953 12.776,31.14 12.192,31.14
+3V3_DAC on Bottom Layer (Sig) "+3V3_DAC_L06_P103" (solid, pour order 103): 24.79,26.467 22.835,26.467 22.835,26.695 22.022,26.695 21.92,26.594 21.92,25.781 23.901,25.781 24.181,25.502 24.79,25.502
+3V3_DAC on Bottom Layer (Sig) "+3V3_DAC_L06_P102" (solid, pour order 102): 23.825,32.233 24.968,32.233 24.968,31.115 25.4,31.115 25.4,30.302 25.603,30.302 25.603,33.528 23.825,33.528
+3V3_DAC on Bottom Layer (Sig) "+3V3_DAC_L06_P101" (solid, pour order 101): 21.946,31.039 21.946,29.87 24.79,29.87 24.79,30.785 22.784,30.785 22.784,31.039
-3V3 on Bottom Layer (Sig) "-3V3_L06_P078" (solid, pour order 78): 18.825,25.44 20.577,25.44 20.577,24.754 18.825,24.754
+3V3_DIG on Bottom Layer (Sig) "+3V3_DIG_L06_P068" (solid, pour order 68): 25.806,30.302 25.806,33.553 27.076,33.553 27.076,32.283 26.924,32.131 26.568,32.131 26.289,31.852 26.289,31.394 26.035,31.14 26.01,31.14 26.01,30.302
-3V3 on Bottom Layer (Sig) "-3V3_L06_P092" (solid, pour order 92): 9.855,21.158 9.855,23.901 10.719,23.901 10.719,23.063 10.236,22.581 10.236,21.996 10.084,21.844 10.084,21.158
+3V3_ANALOG on Bottom Layer (Sig) "+3V3_ANALOG_L06_P091" (solid, pour order 91): 9.068,21.869 8.89,22.047 8.89,24.003 7.95,24.003 7.95,23.038 8.382,22.606 8.382,21.996 8.814,21.565 8.814,20.955 9.068,20.955
+3V3_ANALOG on Bottom Layer (Sig) "+3V3_ANALOG_L06_P089" (solid, pour order 89): 28.092,24.105 32.283,24.105 32.283,23.47 30.531,23.47 30.175,23.114 28.092,23.114
GND on Bottom Layer (Sig) "GND_L06_P087" (solid, pour order 87): 27.33,33.274 28.677,33.274 28.677,31.674 27.33,31.674
GND on Bottom Layer (Sig) "GND_L06_P086" (solid, pour order 86): 23.597,33.858 27.381,33.858 27.381,36.83 23.597,36.83
+3V3_ANALOG on Bottom Layer (Sig) "+3V3_ANALOG_L06_P077" (solid, pour order 77): 15.825,22.86 17.577,22.86 17.577,22.174 15.825,22.174
+3V3_ANALOG on Bottom Layer (Sig) "+3V3_ANALOG_L06_P075" (solid, pour order 75): 25.552,20.752 25.552,16.485 24.816,16.485 24.816,18.11 24.435,18.491 24.435,20.752
+3V3_DAC on Bottom Layer (Sig) "+3V3_DAC_L06_P074" (solid, pour order 74): 29.947,25.933 29.286,25.933 29.286,25.273 28.524,25.273 28.524,24.994 26.416,24.994 26.416,25.933 26.213,25.933 26.213,24.409 29.947,24.409
DVDD on Bottom Layer (Sig) "DVDD_L06_P069" (solid, pour order 69): 26.619,31.039 27.076,31.039 27.483,31.445 28.169,31.445 28.169,30.277 26.619,30.277
BAT+ on Bottom Layer (Sig) "BAT+_L06_P025" (solid, pour order 25): 29.997,41.377 29.997,38.989 32.436,38.989 32.436,41.377 32.385,41.377
SW_BQ on Bottom Layer (Sig) "SW_BQ_L06_P013" (solid, pour order 13): 35.992,40.742 33.985,38.735 33.985,36.711 35.103,36.711 36.678,38.285 36.678,40.742
BOOT_BQ on Bottom Layer (Sig) "BOOT_BQ_L06_P011" (solid, pour order 11): 35.941,41.054 37.541,41.054 37.541,42.934 35.941,42.934
NetD203_2 on Bottom Layer (Sig) "NETD203_2_L06_P003" (solid, pour order 3): 46.727,45.436 46.727,44.801 46.574,44.648 45.838,44.648 45.838,44.166 45.482,43.81 44.822,43.81 44.822,45.436
NetD203_1 on Bottom Layer (Sig) "NETD203_1_L06_P001" (solid, pour order 1): 42.469,45.44 42.469,44.805 42.622,44.652 43.358,44.652 43.358,44.17 43.714,43.814 44.374,43.814 44.374,45.44
GND on L5 (GND) "GND_L05_P028" (solid, pour order 28): 0,53 0,0 63,0 63,53
GND on L2 (GND) "GND_L02_P009" (solid, pour order 9): 0,53 0,0 63,0 63,53
GND on L4 (Sig) "GND_L04_P110" (solid, pour order 110): 0,53 0,0 63,0 63,53
+3V3_DIG on L4 (Sig) "+3V3_DIG_L04_P095" (solid, pour order 95): 32.385,-0.102 32.385,17.882 37.465,17.882 46.863,8.484 48.954,8.484 48.954,13.411 45.974,13.411 33.884,25.502 33.884,45.212 63,45.212 63,0
+3V3_ANALOG on L4 (Sig) "+3V3_ANALOG_L04_P106" (solid, pour order 106): 19.152,17.653 19.152,16.231 21.488,16.231 21.488,17.653
SYS on L4 (Sig) "SYS_L04_P098" (solid, pour order 98): 29.591,14.249 31.217,14.249 31.217,15.951 29.591,15.951
SYS on L4 (Sig) "SYS_L04_P094" (solid, pour order 94): 27.813,34.468 33.833,34.468 33.833,38.786 27.813,38.786
GND on L3 (Sig) "GND_L03_P113" (solid, pour order 113): 0,53 0,0 63,0 63,53

## Silkscreen, mask and mechanical layers (free items; w line width, h text height)
Top Overlay:
  lines w0.051: 15.494,-10 15.494,-1.872 15.748,-1.872 25.908,-1.872 25.908,38.514 15.494,38.514 15.494,52.992
Bottom Overlay:
  lines w0.051: 15.494,-10 15.494,-1.872 15.748,-1.872 25.908,-1.872 25.908,38.514 15.494,38.514 15.494,52.992
Mechanical 13:
  the board outline again, w0.254

## Text inside footprints (layer, text, board x,y; h text height)
J201: Mechanical 13 "PCB EDGE" at 39.652,52.822 h0.81 r180